# Altium PCB miniPPG.PcbDoc
Units mil, origin at the board's own origin, x right, y up, seen from the top; angles counter-clockwise.
Board outline 241 x 200 mil, 2 copper layers (Top Layer, Bottom Layer); 16 components, 12 nets, 48 pads, 13 vias.
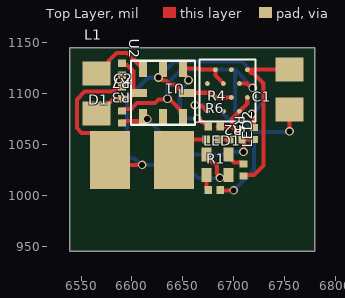
[diagram p0: Top Layer view]
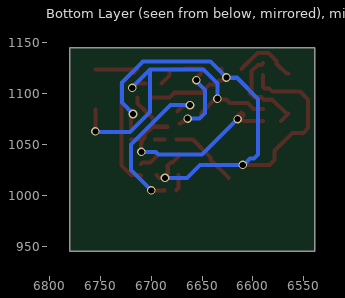
[diagram p1: Bottom Layer view, seen from below]

## Layer stack, top to bottom
Top Solder: solder mask 0.4, Solder Resist, Dk 3.5
Top Layer: signal copper 1.4
Dielectric 1: dielectric 12.6, FR-4, Dk 4.8
Bottom Layer: signal copper 1.4
Bottom Solder: solder mask 0.4, Solder Resist, Dk 3.5

## Board outline
6539,945 6539,1145 6780,1145 6780,945

## Design rules (kind name [scope] priority, off if disabled: settings)
Clearance [All] p1: gap=4 ignorepadtopadclearanceinfootprint=FALSE except(0: Arc-Text Arc-Hole Track-Text Track-Hole SMDPad-Text SMDPad-Hole THPad-Text THPad-Hole Via-Text Via-Hole Fill-Text Fill-Hole Poly-Text Poly-Hole Region-Text Region-Hole Text-Text Text-Hole; 3.5: Arc-SMDPad Track-SMDPad)
HoleToHoleClearance [All] p1: gap=5 allowstackedmicrovias=TRUE
MinimumSolderMaskSliver [All] p1: minsoldermaskwidth=4
PolygonConnect [All] p1: connectstyle=Relief reliefconductorwidth=10 reliefentries=4 polygonreliefangle="90 Angle" airgapwidth=10
RoutingVias [All] p1: holewidth=28 width=50 viastyle="Through Hole" minholewidth=5 minwidth=6 maxholewidth=28 maxwidth=50
SilkToSilkClearance [All] p1: silktosilkclearance=0
SilkToSolderMaskClearance [IsPad] p1: minsilkscreentomaskgap=0 clearancetoexposedcopper=TRUE
SolderMaskExpansion [All] p1: expansion=0 istentingtop=FALSE
Width [All] p1: maxlimit=20 minlimit=4 preferedwidth=4 minimp=50.000000 maximp=50.000000 favimp=50.000000
26 further rules are at their usual default settings.

## Components (designator, comment, footprint, x,y, rotation, side; value= is the part's Value field where it differs from the comment)
* "0402" 0402 6755,1104 r0 top
C1 "0.1 uF" 01005 6720,1060.91 r0 top
C2 "0.1 uF" 01005 6590,1100.91 r0 top
D1 "Photodiode" FP-6_541-5064_01-4-MFG 6610,1035 r180 top
L1 "Antenna Header" 0402 6565,1100 r180 top
LED1 "Red" 0201 6684.17,1020 r270 top
LED2 "Green" 0201 6684.17,1040 r90 top
R1 "220" 01005 6680.91,1005 r90 top
R2 "220" 01005 6710,1025 r0 top
R3 "4.7k" 01005 6590,1077.09 r0 top value="0.1 uF"
R4 "4.7k" 01005 6681.02,1067.5 r90 top value="0.1 uF"
R5 "1M" 01005 6702.28,1055 r90 top
R6 "1M" 01005 6679,1055 r90 top
R7 "220" 01005 6590,1124.09 r180 top
U1 "ATTiny20" ATTINY10 6713.62,1123.64 r180 top
U2 "NFC" NFC 6630.75,1100.95 r270 top

## Footprints (in the part's own frame and the unit in brackets; to place one, negate y for a bottom-side part, rotate by r counter-clockwise, add the part's x,y. Pads: shape width x height; smd on the part's side, far side on the other; paste and mask are expansions set on the pad)
0201 [mm]
  rect 0.35x0.25 smd: 0(0,0.275) 1(0,-0.275)
0402 [mm]
  rect 0.7x0.6 smd: 0(0,0.5) 1(0,-0.5)
01005 [mm]
  rect 0.2x0.18 smd: 0(0,0.15) 1(0,-0.15)
ATTINY10 [mm]
  round 0.12 smd: 1A(1,1.039) 1C(1,0.346) 2B(0.8,0.693) 2D(0.8,0) 3A(0.6,1.039) 3C(0.6,0.346) 4B(0.4,0.693) 4D(0.4,0) 5A(0.2,1.039) 5C(0.2,0.346) 6B(0,0.693) 6D(0,0)
  silkscreen extent -0.2,-0.26 1.2,1.3
FP-6_541-5064_01-4-MFG [mm]
  rect 1x1.45 smd paste+0 mask+0: 1(-0.8,0) 2(0.8,0)
  body extent -1.4,-0.82 1.4,0.82, height 0.25
NFC [mm]
  rect 0.4x0.2 smd: 1(-0.6,-0.5) 2(-0.6,0) 3(-0.6,0.5) 5(0.6,0.5) 6(0.6,0) 7(0.6,-0.5)
  rect 0.2x0.4 smd: 4(0,0.6) 8(0,-0.6)
  silkscreen extent -0.8,-0.8 0.8,0.8

## Part data
*: "0402 Component"
C1 C2 R3 R4: library part 01005, "01005 Component", MPN=CL02A104KQ2NNNC
D1: library part CMP-02531-000004-1, "0805 PHOTODIODE / temd7000x01", Ambient Temperature Range High=+100°C, Ambient Temperature Range Low=-40°C, Dark Current=0.0001uA, Manufacturer=Vishay, MPN=TEMD6200FX01, Package=6.541-5064.01-4, Power Dissipation=100mW, Reverse Breakdown Voltage=16V, Temperature="-40°C to +100°C", Automotive=Yes, Automotive Grade="Grade 3", Category=Diode, ComponentLink2Description=Datasheet, ComponentLink2URL=http://www.vishay.com/docs/81812/temd6200.pdf, Device Class L1=Sensors, Device Class L2="Optical Sensors", Device Class L3=Photodiodes, Digikey Description="SENSOR PHOTODIODE 540NM 0805", Height=0.95mm, Lead Free=Yes, Max Junction Temp=+100°C, Mouser Description="Ambient Light Sensors 16V 100mW 60Deg AEC-Q101 Qualified", Octopart=https://octopart.com/temd6200fx01-vishay-19158932, RoHS=TRUE, Sensor Output=Photodiode, Temperature Range High=+100°C, Temperature Range Low=-40°C, Viewing Angle=120°
L1: library part 0402, "0402 Component"
LED1: library part 0201, "0201 Component / XZMDR155W", MPN=XZMDR155W
LED2: library part 0201, "0201 Component / XZBGR155W5MAV", MPN=XZBGR155W5MAV
R1 R2 R7: library part 01005, "01005 Component / CRCW0100220RFREL", MPN=CRCW0100220RFREL
R5 R6: library part 01005, "01005 Component / CRCW01001M00FREL", MPN=CRCW01001M00FREL

## Via types
v1: diameter 8.5, hole 6, Top Layer to Bottom Layer, 13 vias

## Nets (pads, with @x,y where several pads share a name; then routed paths per layer and width w, separated by ;. In a path a pad name is that pad's centre, name@x,y a point inside that pad or via, vN(x,y) a via of type N, cw(c..) or ccw(c..) an arc to the next point about the centre after c; other vN are vias at no path point)
Ant: C2.1 L1.0 R7.1 U2.8 | length 93.3
  Top Layer w4: L1.0@6572.13,1073.19 L1.0 6566.97,1080.32 6580.7,1094.04 6589.04,1094.04 C2.1 6591.54,1096.54 6598.79,1096.54 6603.19,1100.95 6601.25,1102.88 6601.25,1122.2 6594.99,1128.46 6591.54,1128.46 R7.1
GND: C1.0 C2.0 D1.2 LED1.0 LED2.0 R7.0 U1.2B U1.4B U2.2 U2.4 | length 667.2
  Top Layer w4: R7.0 C2.0 6588.46,1105.27 6583.95,1105.27 6580.73,1102.04 6553.36,1102.04 6545.72,1094.4 6545.72,1066.23 6550.4,1061.54 6560.82,1061.54 6578.5,1043.86 D1.2 6583.5,1030 v1(6610,1030) ; U2.2 6630.75,1120.63 6625.83,1115.71 6627.66,1115.71 6630.37,1113 6633.31,1113 6637.45,1108.87 6642.51,1108.87 6650.43,1100.95 6677.34,1100.95 6681.93,1096.36 U1.2B U1.4B ; LED2.0 6673.35,1038.03 6678.99,1032.39 6680.55,1032.39 6683.77,1029.17 6683.77,1021.15 6686.52,1018.4 v1(6686.52,1017.19) ; v1@6686.52,1016.52 6687.19,1017.19 6692.19,1017.19 LED1.0 ; v1(6718,1080) 6718,1078.78 6720,1076.78 C1.0
  Bottom Layer w4: v1@6625.83,1115.85 6641.61,1131.64 6708.36,1131.64 6729,1111 6729,1091.28 6718,1080.28 v1(6718,1080) ; v1(6626.14,1116.02) 6625.83,1115.71 6615.71,1115.71 6595,1095 6595,1040 6598.84,1036.16 6602.62,1036.16 6608.78,1030 6651.94,1030 6664.76,1017.19 v1(6686.52,1017.19)
LED1: R1.1 U1.1A | length 155.8
  Top Layer w4: v1@6661.81,1088.76 6662.67,1087.9 6668.89,1087.9 6674.06,1082.74 U1.1A ; R1.1 6686.88,1004.93 6699.93,1004.93 v1(6700,1004.86)
  Bottom Layer w4: v1@6661.81,1088.76 6681.24,1088.76 6720,1050 6720,1024.86 v1(6700,1004.86)
  other v1: 6661.91,1088.76
LED2: *.0 R2.1 U1.6D | length 167
  Top Layer w4: R2.1 6710.84,1019.94 6719.94,1019.94 6729.44,1029.44 6729.44,1110.06 6719.25,1120.25 6717.21,1120.25 U1.6D@6713.82,1123.64 ; U1.6D U1.6D@6713.82,1123.64 ; *.0 6754.96,1123.64 U1.6D@6713.82,1123.64
NetD1_1: D1.1 R6.0 | length 68.2
  Top Layer w4: D1.1@6623.81,1017.31 D1.1 6641.5,1037.31 6659.18,1055 R6.0@6675,1055
NetL1_1: L1.1 U2.1 | length 62.4
  Top Layer w4: L1.1 6566.97,1119.68 6576.78,1129.5 6576.78,1132.04 6584.74,1140 6595.63,1140 U2.1
NetLED1_1: LED1.1 R1.0 | length 15.7
  Top Layer w4: LED1.1 6673.35,1007.05 6675,1005.39 R1.0
NetLED2_1: LED2.1 R2.0 | length 19.9
  Top Layer w4: LED2.1 6695,1038.03 6700.58,1032.45 6708.46,1032.45 R2.0
NetR5_0: R5.0 R6.1 | length 9.6
  Top Layer w4: R6.1@6686.81,1055 R5.0
SCL: R4.0 U1.2D U1.3C U2.3 | length 128.4
  Top Layer w4: v1(6655.61,1113.39) 6654.75,1114.25 6654.75,1116.31 6650.43,1120.63 U2.3 6650.87,1125 6665,1125 6666.22,1125 6667.58,1123.64 U1.2D 6682.26,1123.5 6682.26,1117.74 U1.3C ; v1(6664.23,1075.5) 6665.45,1075.5 6668.51,1072.43 6669.14,1072.43 6671.07,1070.5 R4.0@6672.42,1070.5
  Bottom Layer w4: v1(6655.61,1113.39) 6655.61,1112.17 6647,1103.56 6647,1081 6652.5,1075.5 v1(6664.23,1075.5)
SDA: *.1 R3.0 U1.5C U2.5 | length 326
  Top Layer w4: R3.0@6590,1085 6599.28,1085 6601.63,1087.34 6601.63,1087.48 6604.96,1090.81 6622.75,1090.81 6626.08,1094.14 6634.14,1094.14 v1(6635,1095) 6635.86,1094.14 6637.55,1094.14 6650.43,1081.26 U2.5 ; U1.5C 6705.89,1109.86 6713.32,1109.86 6717.53,1105.65 v1@6718.75,1105.65 ; v1(6755,1063) *.1
  Bottom Layer w4: v1(6635,1095) 6635,1110 6648.64,1123.64 6701.36,1123.64 ; v1(6718.75,1105.75) 6718.75,1106.25 6701.36,1123.64 ; v1(6755,1063) 6754.49,1062.49 6721.02,1062.49 6701.36,1082.15 6701.36,1123.64
VCC: C1.1 R3.1 R4.1 R5.1 U1.5A U1.6B U2.7 | length 237.4
  Top Layer w4: R3.1@6590,1073.19 6609.13,1073.19 6611.06,1075.13 U2.7 6611.06,1079.07 U2.7@6611.06,1081.26 ; R4.1@6684.23,1067.5 6698.46,1067.5 ; R5.1@6709.64,1056.45 R5.1 ; v1(6709.75,1042.7) 6710,1042.95 6710,1050.72 6709.73,1050.99 6709.73,1053.46 R5.1 ; U1.6B 6713.48,1096.22 6713.48,1090.47 U1.5A 6698.46,1075.45 6698.46,1067.5 ; C1.1 R5.1 ; 6698.46,1067.5 6700.96,1065 6701.64,1065 6706.65,1059.99 6706.65,1056.54 R5.1
  Top Layer w8: U2.7@6611.06,1079.07 6615,1075.14 v1(6615,1075)
  Bottom Layer w4: v1(6615,1075) 6650,1040 6692.92,1040 6695.62,1042.7 v1(6709.75,1042.7)
pads on no net: U1.1C U1.3A U1.4D U2.6

## Silkscreen, mask and mechanical layers (free items; w line width, h text height)
Mechanical 1:
  the board outline again, w1